# EAGLE board Displayboard_PCB (EAGLE 9.7.0)
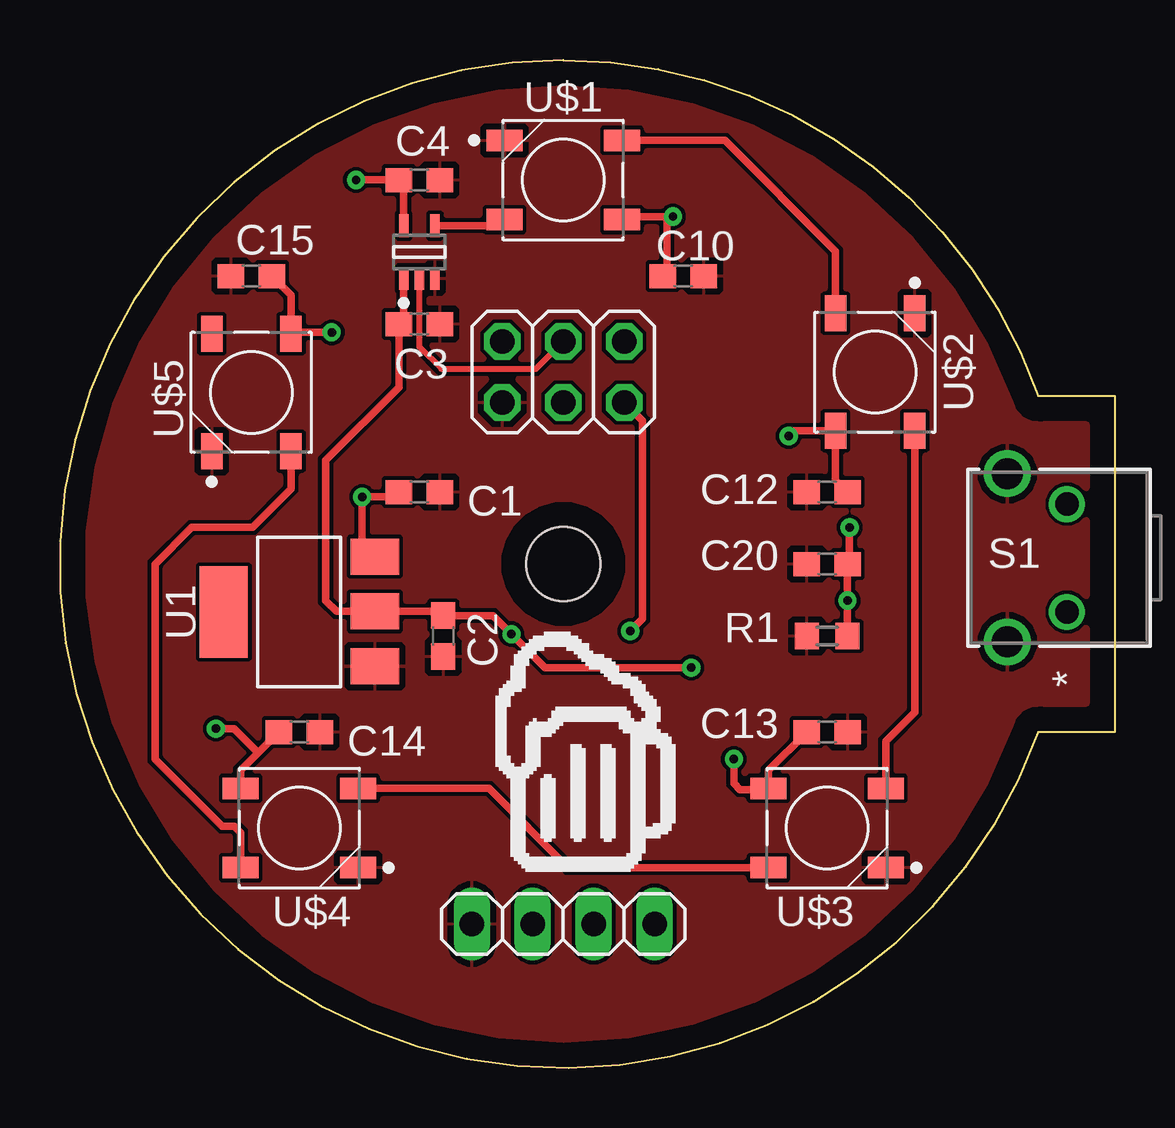
[diagram p0: board, top side]
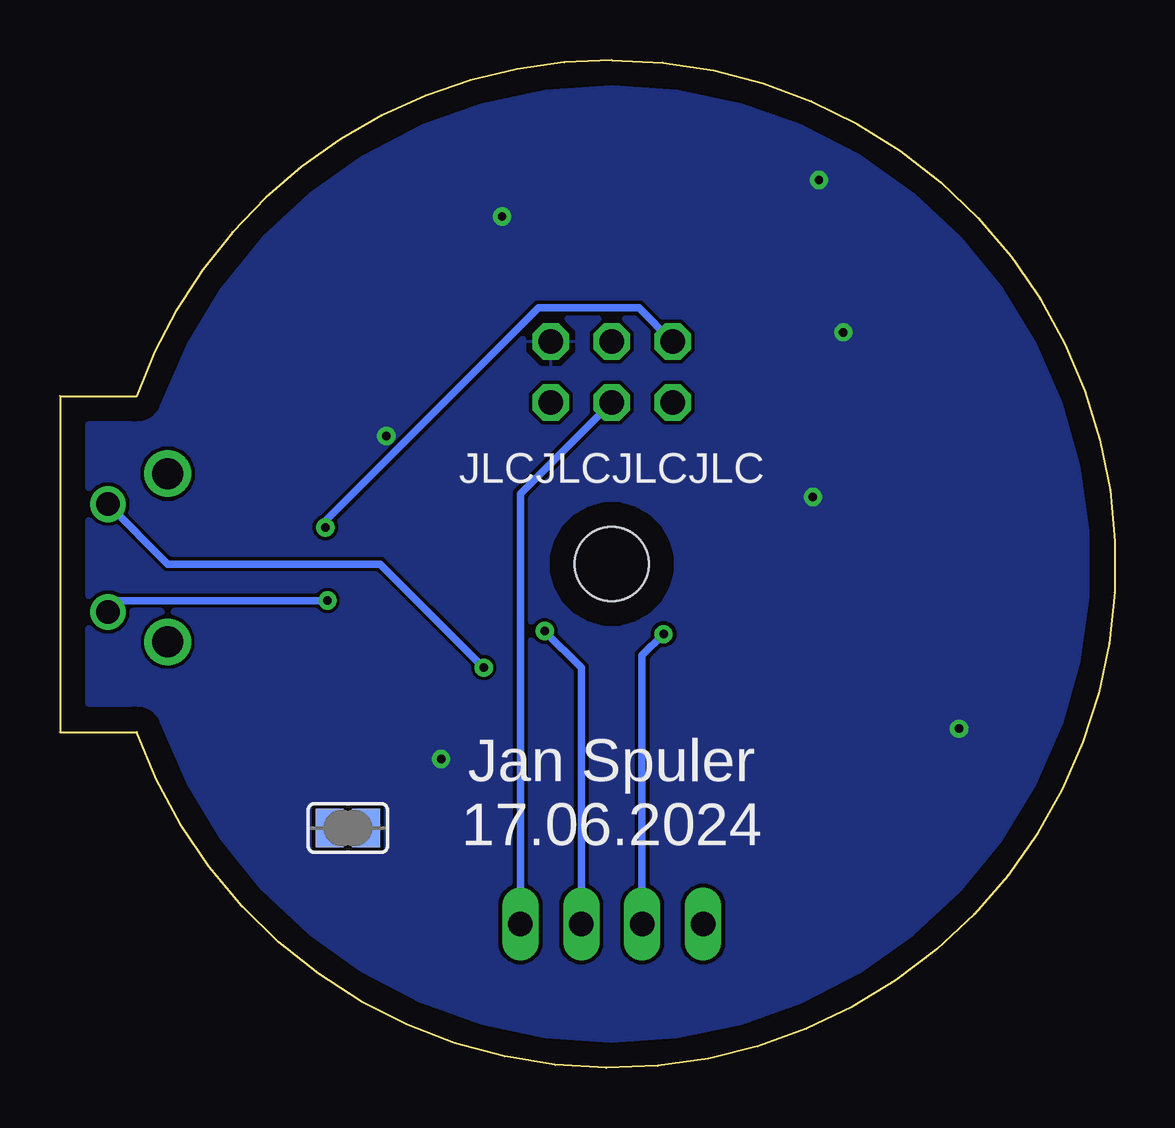
[diagram p1: board, bottom side, seen from below]

Size 43.98 x 42 mm. Coordinates in mm from the lower left corner, seen from the top.
Outline: 43.98,28 43.98,14 40.78,14 arc-251 20.98,42 arc-71 40.78,28 43.98,28
Copper layers (1*16): Top / Bottom
Stack-up Default Layer Stack: Top User Defined 0.035mm / Dielectric-1 User Defined 1.5mm / Bottom User Defined 0.035mm
Design rules: minimum copper width 6mil, minimum drill size 0.35mm, copper clearance wire_polygon to wire_polygon 6mil, copper clearance wire_polygon to pad_smd 6mil, copper clearance wire_polygon to via 6mil, copper clearance pad_smd to pad_smd 6mil, copper clearance pad_smd to via 6mil, copper clearance via to via 6mil, copper clearance smd to pad (same net) 6mil, copper clearance smd to via (same net) 6mil, copper clearance smd to smd (same net) 6mil, dimension clearance 40mil, via restrict clearance 0mil, restrict clearance 0mil, drill distance 6mil, keepout clearance 0mil
Holes 3.1 mm at 20.98,21

## Footprints (pad centres in the part's own frame; a part is rotated, then mirrored left to right if it is on the bottom)
C0603 = smd 1.1 x 1: 1 -0.85,0; 2 0.85,0
1X04 = drill 1.016 long: 1 -3.81,0; 2 -1.27,0; 3 1.27,0; 4 3.81,0
2X03 = drill 1.016 octagon: 1 -2.54,-1.27; 2 -2.54,1.27; 3 0,-1.27; 4 0,1.27; 5 2.54,-1.27; 6 2.54,1.27
R0603 = smd 1 x 1.1: 1 -0.85,0; 2 0.85,0
SW2_1825027-A = drill 0.991 pad 1.499: 1 0,0; 2 4.496,0 | drill 1.295 pad 1.803: 3 -1.245,2.489; 4 5.766,2.489
SJ = smd 1.168 x 1.6: 1 -0.762,0; 2 0.762,0
SOT223 = smd 1.499 x 2.007: 1 -2.261,-3.15; 2 0.025,-3.15; 3 2.311,-3.15 | smd 3.81 x 2.007: 4 0,3.15
DCK0005A-MFG = smd 0.95 x 0.4: 1 -1.1,0.65; 2 -1.1,0; 3 -1.1,-0.65; 4 1.1,-0.65; 5 1.1,0.65
WS2812_5050 = smd 1.5 x 0.9: DI -2.45,-1.65; DO 2.45,1.65; GND -2.45,1.65; VCC 2.45,-1.65

## Placement (x,y rotation side)
C1  10uF  [C0603]  14.98,24 0 top
C2  22uF  [C0603]  15.98,18 270 top
C3  100n  [C0603]  14.98,31 0 top
C4  100n  [C0603]  14.98,37 0 top
C10  100n  [C0603]  25.98,33 0 top
C12  100n  [C0603]  31.98,24 180 top
C13  100n  [C0603]  31.98,14 0 top
C14  100n  [C0603]  9.98,14 0 top
C15  100n  [C0603]  7.98,33 180 top
C20  100n  [C0603]  31.98,21 180 top
JP1  [1X04]  20.98,6 0 top
JP2  PINHD-2X3  [2X03]  20.98,29 180 top
R1  10k  [R0603]  31.98,18 0 top
S1  1825027-5  [SW2_1825027-A]  41.98,19 90 top
SJ1  [SJ]  31.98,10 0 bottom
U1  AMS1117  [SOT223]  9.98,19 90 top
U2  SN74LXC1T14DCKRDCK0005A-MFG  [DCK0005A-MFG]  14.98,34 90 top
U$1  WS2812B_LED  [WS2812_5050]  20.98,37 0 top
U$2  WS2812B_LED  [WS2812_5050]  33.98,29 270 top
U$3  WS2812B_LED  [WS2812_5050]  31.98,10 180 top
U$4  WS2812B_LED  [WS2812_5050]  9.98,10 180 top
U$5  WS2812B_LED  [WS2812_5050]  7.98,28.15 90 top

## Library data of the parts
C1-C4 C10 C12-C15 C20 = rcl; SPICEPREFIX: C
JP1 = pinhead
JP2 = Connector; CATEGORY: Headers; DESCRIPTION: Header, Straight, 2x3 Position; MANUFACTURER: Generic; MPN: Generic; OPERATING_TEMPERATURE: Generic; PART_STATUS: Active; PITCH: 0.100" (2.54mm); ROHS_COMPLIANCE: Generic; SERIES: Generic; SUB-CATEGORY: Headers, Male Pins; TYPE: Board to Board or Cable, Unshrouded, Through Hole, Straight
R1 = rcl; SPICEPREFIX: R
S1 = Switches; BUILT_BY: EMA_UL_Team; CATEGORY: Tactile Switches; CONFIGURATION__POLE-THROW_: Single Pole - Single Throw; CONTACT_CURRENT_RATING: 50; COPYRIGHT: Copyright (C) 2016 Accelerated Designs. All rights reserved; DESCRIPTION: FSMRA2JH04=R/A,TACT PB SW,160G; MANUFACTURER_PART_NUMBER: 1825027-5; MAX_SWITCHING_CURRENT: -; MAX_SWITCHING_VOLTAGE_AC_: -; PART_STATUS: active; PRODUCT_TYPE: Switch; SERIES: Unknown; SWITCH_TYPE: Tactile Switches; TE_INTERNAL_NUMBER: 1825027-5; TE_PART_NUMBER: 1825027-5; VENDOR: TE Connectivity; VOLTAGE_RATING: -
SJ1 = jumper
U1 = PulseOximeterECG_AU; MF: TEXAS INSTRUMENTS; MPN: REG1117FAKTTT; OC_FARNELL: 1296120; OC_NEWARK: 87H2562
U2 = 2024-05-29_22-22-57_Library; COPYRIGHT: Copyright (C) 2024 Ultra Librarian. All rights reserved.; MANUFACTURER_PART_NUMBER: SN74LXC1T14DCKR; MFR_NAME: Texas Instruments; REFDES: RefDes; TYPE: TYPE
U$1-U$5 = hbli8971

## Nets
+3V3: C2.1 C3.1 JP1.2 S1.2 U1.2 U2.1
DATA_LED: U2.4 U$1.DI
GND: C1.2 C2.2 C3.2 C4.2 C10.2 C12.2 C13.2 C14.2 C15.2 C20.2 JP1.1 JP2.6 R1.1 S1.3 S1.4 U1.1 U2.3 U$1.GND U$2.GND U$3.GND U$4.GND U$5.GND
GPIO15: JP2.3 U2.2
GPIO18: C20.1 JP2.5 R1.2 S1.1
LP_I2C_SCL: JP1.3 JP2.2
LP_I2C_SDA: JP1.4 JP2.4
N$1: U$1.DO U$2.DI
N$2: U$2.DO U$3.DI
N$3: U$3.DO U$4.DI
N$4: U$4.DO U$5.DI
VCC: C1.1 C4.1 C10.1 C12.1 C13.1 C14.1 C15.1 JP2.1 U1.3 U2.5 U$1.VCC U$2.VCC U$3.VCC U$4.VCC U$5.VCC

## Tracks (layer width: path | path; a pad name or v marks a point on that pad's centre or on a via)
+3V3  (via drill 0.35)
  Top 0.305: U2.1 14.33,31.2 C3.1 14.13,28.37 11.07,25.32 11.07,19.47 11.52,19.02 U1.2 15.8,19.02 C2.1 18.05,18.85 v18.82,18.08 20.22,16.68 v26.31,16.68
  Bottom 0.305: S1.2 39.48,21 30.63,21 v26.31,16.68 | JP1.2 19.71,17.19 v18.82,18.08
DATA_LED
  Top 0.305: U2.4 18.28,35.1 U$1.DI
GND
  pour Top: -2.01,43.73 45.36,43.73 45.36,-1.79 -2.01,-1.79
GPIO15
  Top 0.254: U2.2 14.98,30.05 15.9,29.13 19.84,29.13 JP2.3
GPIO18  (via drill 0.35)
  Top 0.305: R1.2 v32.83,19.47 C20.1 32.92,21.09 v32.92,22.52
  Bottom 0.305: S1.1 41.5,19.47 v32.83,19.47 | JP2.5 19.84,31.67 24.03,31.67 32.92,22.78 v32.92,22.52
LP_I2C_SCL  (via drill 0.35)
  Top 0.305: v23.77,18.2 24.28,18.71 24.28,26.97 JP2.2
  Bottom 0.305: JP1.3 22.25,16.68 v23.77,18.2
LP_I2C_SDA
  Bottom 0.305: JP1.4 24.79,23.92 JP2.4
N$1
  Top 0.305: U$1.DO 27.71,38.65 32.33,34.03 U$2.DI
N$2
  Top 0.305: U$3.DI 34.43,13.62 35.63,14.82 U$2.DO
N$3
  Top 0.305: U$3.DO 21.18,8.35 17.88,11.65 U$4.DI
N$4
  Top 0.305: U$4.DO 7.53,9.81 7.26,10.08 6.75,10.08 3.96,12.87 3.96,21 5.48,22.52 8.02,22.52 9.63,24.13 U$5.DI
VCC  (via drill 0.35)
  Top 0.305: U2.5 14.33,36.8 C4.1 v12.34,37 | U$5.VCC 9.63,30.65 | 9.63,30.65 9.63,32.2 C15.1 | U$4.VCC 7.53,12.4 8.27,13.14 | 8.27,13.14 C14.1 | C13.1 29.53,12.4 U$3.VCC 29.48,11.6 28.34,11.6 28.09,11.85 v28.09,12.87 | C12.1 32.33,24.5 U$2.VCC 30.59,26.55 v30.38,26.33 | U1.3 12.6,21.84 v12.6,23.79 13.92,23.79 C1.1 | v6.5,14.14 7.26,14.14 8.27,13.14 | v11.33,30.65 9.63,30.65 | U$1.VCC 23.56,35.48 25.3,35.48 | 25.3,35.48 v25.55,35.48 | C10.1 25.3,33.17 25.3,35.48
  pour Bottom: -3.03,44.87 46.63,44.87 46.63,-2.56 -3.03,-2.56

## Text on the board
NamesBottom: JLCJLCJLCJLC | Jan Spuler / 17.06.2024